# Altium PCB MasterBoard.PcbDoc (part 4 of 4)
Units mil, origin at the board's own origin, x right, y up, seen from the top; angles counter-clockwise.
Board outline 11195 x 7075 mil, 2 copper layers (Top Layer, Bottom Layer); 563 components, 331 nets, 1395 pads, 369 vias.
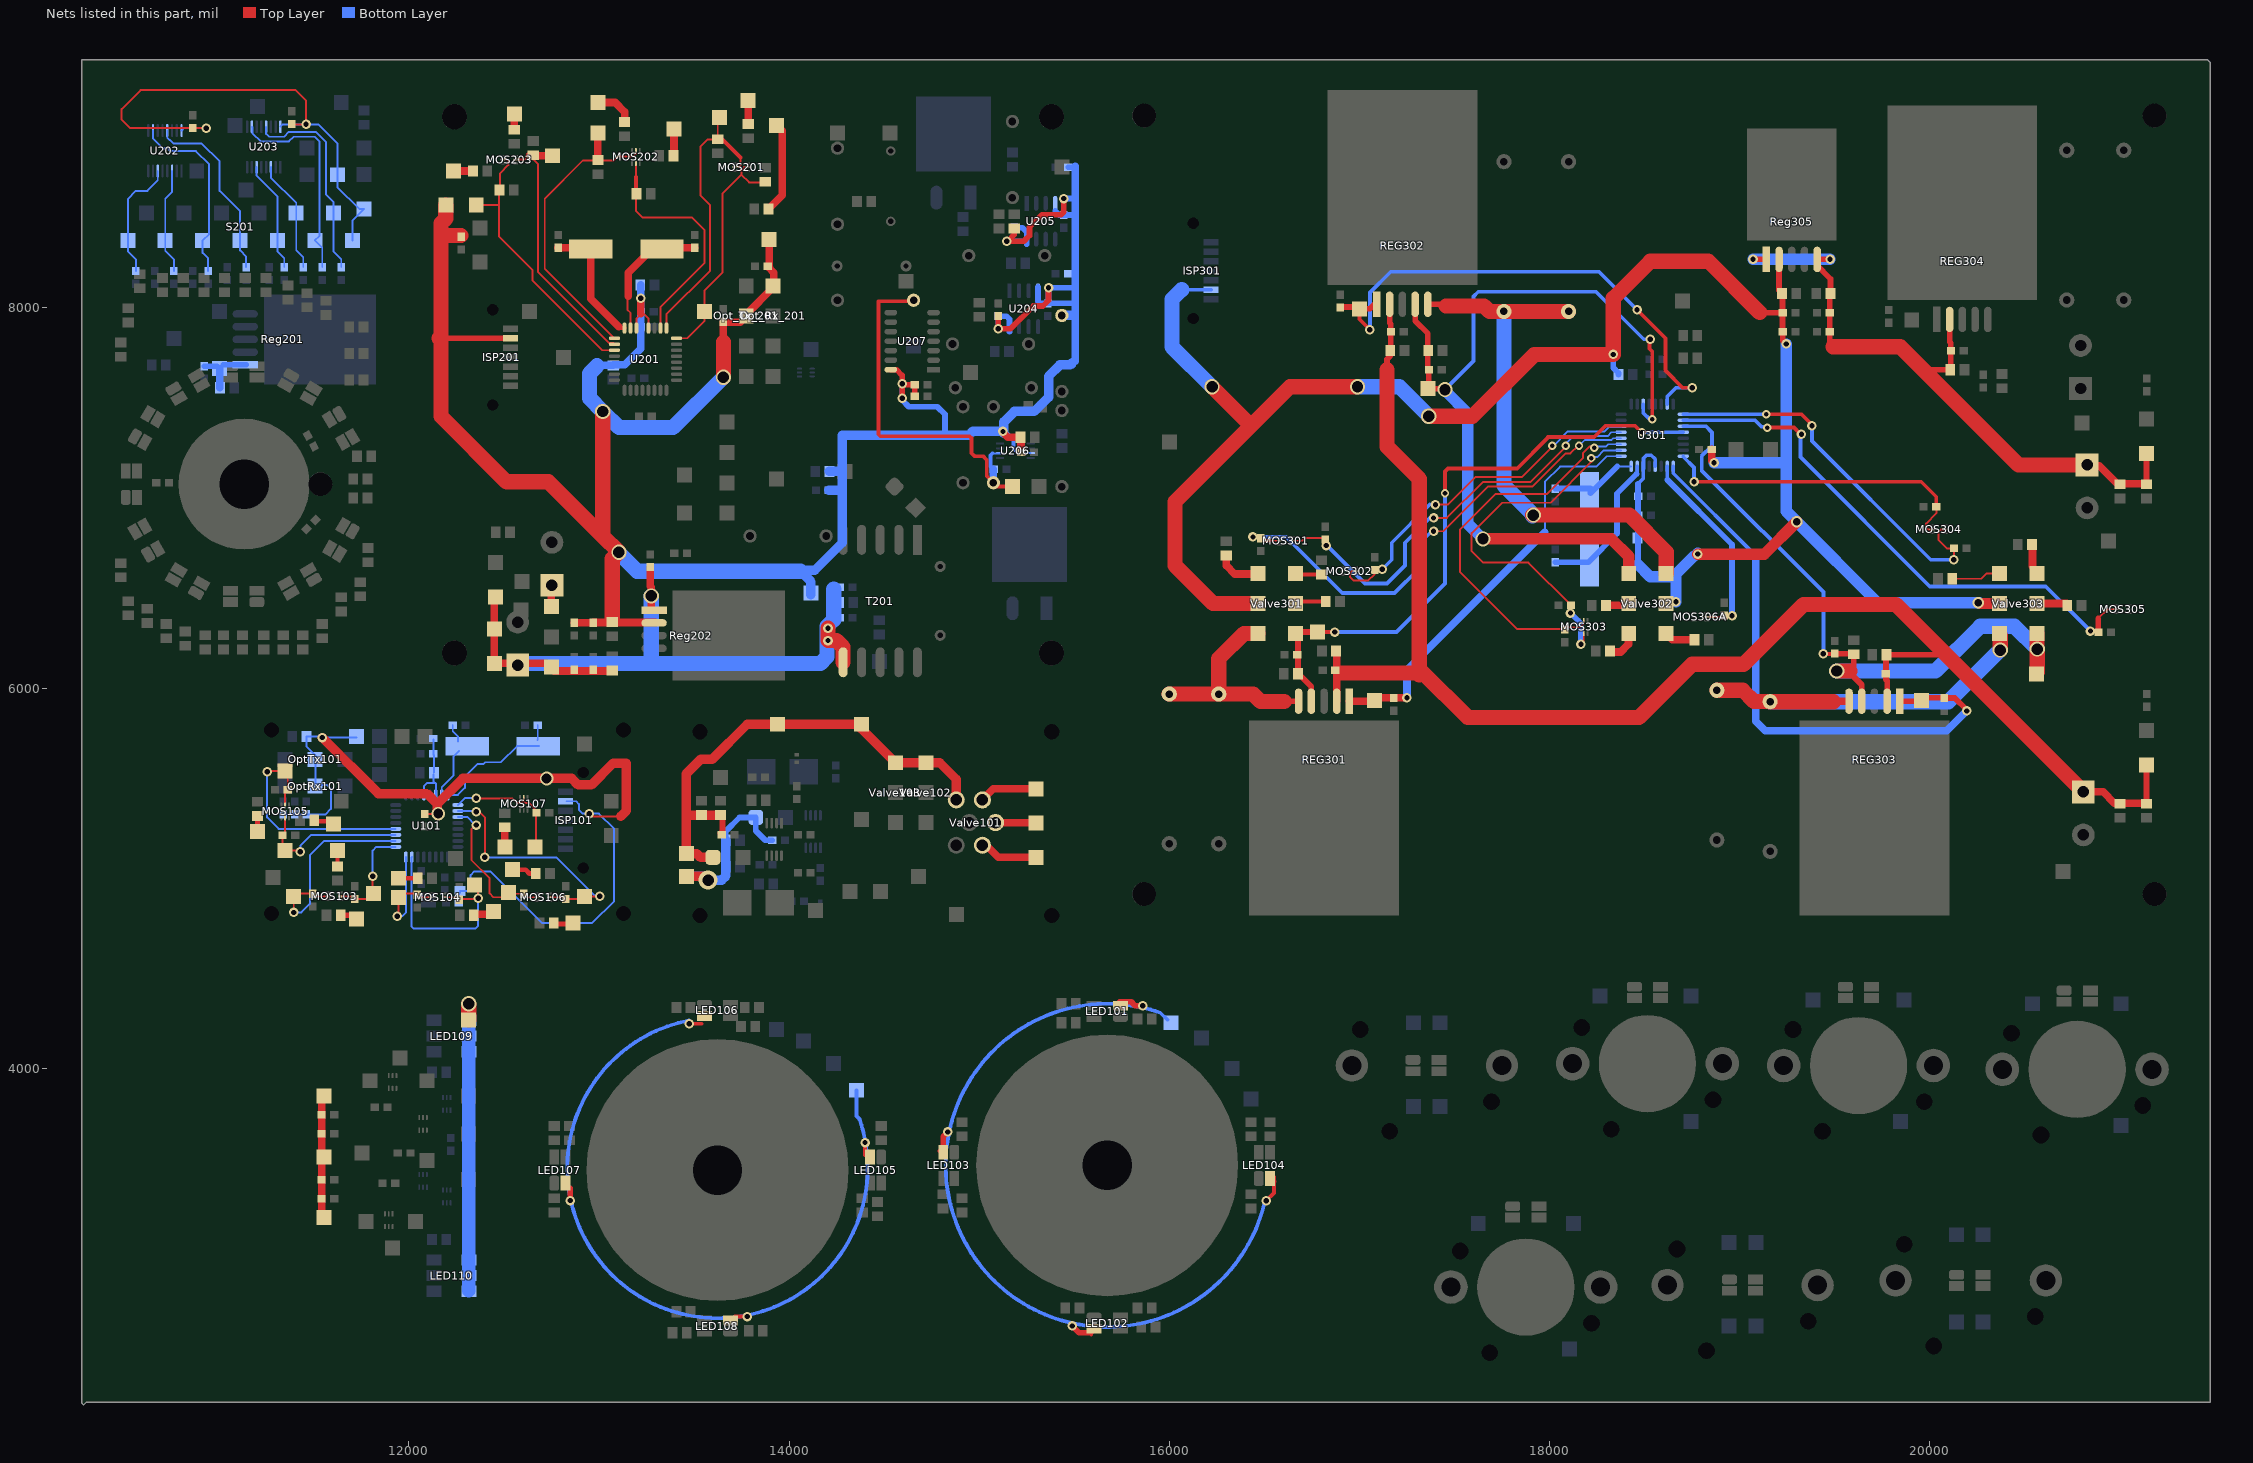
[diagram p4: the nets of this part, all layers, seen from the top]

## Via types
v1: diameter 50, hole 28, Top Layer to Bottom Layer, 263 vias
v2: diameter 80, hole 60, Top Layer to Bottom Layer, 55 vias
v3: diameter 44, hole 24, Top Layer to Bottom Layer, 25 vias
v4: diameter 72, hole 52, Top Layer to Bottom Layer, 11 vias
v5: diameter 145, hole 125, Top Layer to Bottom Layer, 8 vias
v6: diameter 60, hole 40, Top Layer to Bottom Layer, 2 vias
v7: diameter 80, hole 40, Top Layer to Bottom Layer, 2 vias
v8: diameter 100, hole 60, Top Layer to Bottom Layer, 1 vias
v9: diameter 100, hole 80, Top Layer to Bottom Layer, 1 vias
v10: diameter 50, hole 28, Top Layer to Bottom Layer, tented top, 1 vias

## Nets (pads, with @x,y where several pads share a name; then routed paths per layer and width w, separated by ;. In a path a pad name is that pad's centre, name@x,y a point inside that pad or via, vN(x,y) a via of type N, cw(c..) or ccw(c..) an arc to the next point about the centre after c; other vN are vias at no path point) (continued)
SW_205: R205.1 S201.3 U202.3 | length 560.4
  Bottom Layer w10: U202.3@10755,8720 10755,8610 10719.17,8574.17 S201.3@10719.17,8354.33 10719.17,8300.83 10765,8255 R205.1@10765,8193.46
SW_206: R201.1 S201.1 U202.6 | length 644.7
  Bottom Layer w10: R201.1@10565,8193.46 10565,8255 10522.32,8297.68 S201.1@10522.32,8354.33 10522.32,8572.32 10565,8615 10625,8615 10680,8670 U202.6@10680,8720
SW_207: R209.1 S201.6 U202.10 | length 988
  Bottom Layer w10: U202.10@10655,8932.6 10655,8890 10711.34,8833.66 10719.67,8842 10728.48,8842 10746.35,8824.13 10880.82,8824.13 10950,8754.95 10950,8388.31 S201.6@10916.02,8354.33 10916.02,8288.98 10945,8260 R209.1@10945,8193.46
SW_208: R204.2 S201.8 U202.13 | length 978.9
  Bottom Layer w10: U202.13@10730,8932.6 10730,8895 10743,8882 10745.05,8882 10762.92,8864.13 10910.87,8864.13 11005,8770 11005,8615 11112.87,8507.13 S201.8@11112.87,8354.33 11112.87,8302.13 11145,8270 R204.2@11145,8213.46
SW_209: R210.2 S201.11 U203.3 | length 597
  Bottom Layer w10: U203.3@11275,8740 11275,8685 11408.15,8551.85 S201.11@11408.15,8500 11408.15,8301.85 11445,8265 R210.2@11445,8213.46
SW_210: R208.2 S201.10 U203.6 | length 586.6
  Bottom Layer w10: U203.6@11200,8740 11200,8695 11309.72,8585.28 S201.10@11309.72,8354.33 11309.72,8295.28 11345,8260 R208.2@11345,8213.46
SW_211: R244.2 S201.12 U203.10 | length 1113.9
  Bottom Layer w10: U203.10@11175,8952.6 11178.76,8948.84 11178.76,8916.58 11220.34,8875 11370,8875 11395,8900 11505,8900 11530,8875 11530,8377.76 S201.12@11506.57,8354.33 11545,8315.91 R244.2@11545,8213.46
SW_212: R245.1 S201.13 U203.13 | length 1081.6
  Bottom Layer w10: U203.13@11250,8952.6 11250,8915 11265,8900 11345,8900 11370,8925 11510,8925 11565,8870 11565,8595 11605,8555 S201.13@11605,8500 11605,8295 11645,8255 R245.1@11645,8213.46
VALVE+301: C303.2 C304.2 REG301.4 TP301.1 U301.28 Valve301.2 | length 3236.9
  Top Layer w20: TP301.1@16785,6295 v1(16870,6295) ; v3(17450,7025) 17450,7140 17465,7155 17830,7155 17990,7315 ; 17990,7320 18235,7320 18295,7380 18450,7380 v3(18485,7345)
  Top Layer w30: C304.2@16677.4,6075 16677.4,6277.6 16665,6290 16670,6295 TP301.1@16780,6295 TP301.1@16785,6295 ; C304.2@16685,6070 16746.93,6008.07 REG301.4@16746.93,5931.06
  Bottom Layer w20: v1@16860,6295 v1(16870,6295) 17195,6295 17450,6550 v3@17450,7020 ; v3@18485.75,7345.75 U301.28@18703.39,7345.75
VALVE+302: C307.2 C308.2 REG302.4 TP303.1 U301.19 Valve302.2 | length 4428.9
  Top Layer w20: v1@18525,7835 18525,7785 18540,7770 v3(18540,7415)
  Top Layer w30: REG302.4@17293.07,8018.94 17293.07,7931.93 17360,7865 17360,7775 17360,7685 17365,7680 17365,7675 17365,7575 v2@17440,7575
  Top Layer w60: v2@17645,6785 v2(17650,6785) 18325,6785 18416.57,6693.43 Valve302.2@18416.57,6602.48
  Bottom Layer w20: v2@17455,7575 17600,7720 17600,8060 17625,8085 18245,8085 18495,7835 v1(18530,7835) ; U301.19@18492.76,7493.39 18492.76,7447.24 18525,7415 v3@18535,7415
  Bottom Layer w60: v2@17450,7565 17570,7445 17570,6865 v2(17650,6785)
  other v2: 17450,7570
VALVE+303: C311.2 C312.2 REG303.4 TP305.1 U301.27 Valve303.2 | length 3507.1
  Top Layer w20: v1(19440,6180) C311.2@19495,6180
  Top Layer w30: C311.2@19500,6180 19600,6180 C312.2@19600,6177.6 19600,6060 19641.93,6018.07 REG303.4@19641.93,5931.06
  Top Layer w80: v2@19515,6090 19580,6090 ; v2@20563.43,6206.57 Valve303.2@20563.43,6287.52 ; TP305.1@20565,6085 v2(20565,6205)
  Bottom Layer w20: U301.27@18703.39,7377.24 18822.76,7377.24 18855,7345 18855,7275 18800,7220 18800,7145 19440,6505 v1(19440,6180)
  Bottom Layer w80: v2(19510,6090) 20030,6090 20265,6325 20445,6325 v2(20565,6205)
VALVE-301: R301.1 R303.1 REG301.5 Valve301.1 | length 1142.5
  Top Layer w30: 16605,5931.06 REG301.5@16680,5931.06
  Top Layer w80: R303.1@16000,5968.7 R301.1@16260,5968.7 16441.3,5968.7 16480,5930 16605,5930 ; R301.1@16260,5970 16260,6155 16392.52,6287.52 Valve301.1@16466.57,6287.52
VALVE-302: R308.1 R309.1 REG302.5 Valve302.1 | length 2764.5
  Top Layer w30: REG302.5@17360,8018.94 17441.06,8018.94
  Top Layer w80: 17455,8010 17655,8010 17683.7,7981.3 R308.1@17760,7981.3 ; R308.1@17773.7,7981.3 R309.1@18100,7981.3 ; v2@17910,6910 v2(17915,6910) 18420,6910 18613.43,6716.57 Valve302.1@18613.43,6602.48
  Bottom Layer w80: R308.1@17760,7981.3 17760,7065 v2(17915,6910) v2@17910,6905
VALVE-303: R314.2 R315.2 REG303.5 Valve303.1 | length 2116.5
  Top Layer w40: 19498.94,5931.06 REG303.5@19575,5931.06
  Top Layer w80: R315.2@18880,5988.7 19016.3,5988.7 19075,5930 19160,5930 R314.2@19165,5930 ; R314.2@19160,5928.7 19493.7,5928.7 ; v2(20370,6200) Valve303.1@20370,6275
  Bottom Layer w80: R314.2@19160,5928.7 20098.7,5928.7 v2(20370,6200)
VALVE_B_101: I125.1 R106.1 | length 90
  Top Layer w20: R106.1@11625,5055 R106.1@11625,5062.4 I125.1@11625,5145
VALVE_B_101B: I107.1 Valve101.1 | length 306.7
  Top Layer w40: Valve101.1@15017.24,5412.13 15075.12,5470 I107.1@15300,5470
VALVE_B_102: I126.1 R116.1 | length 82.6
  Top Layer w25: R116.1@11515,5300 I126.1@11597.6,5300
VALVE_B_103: I128.1 R123.1 | length 100
  Top Layer w40: I128.1@12505,5165 R123.1@12505,5265
VALVE_B_201: I226.1 R247.1 | length 482.5
  Top Layer w10: I226.1@13935,8960 I226.1@13965,8930
  Top Layer w40: R247.1@13892.4,8520 13965,8592.6 I226.1@13965,8930
VALVE_B_202: I230.1 R254.1 | length 62.6
  Top Layer w40: R254.1@12555,8937.4 I230.1@12555,9000
VALVE_B_301: R317.1 Valve301.6 | length 137.6
  Top Layer w20: Valve301.6@16662.4,6597.6 16663.43,6597.6 R317.1@16800,6597.6
VALVE_B_302: R323.1 Valve302.6 | length 166.6
  Top Layer w40: R323.1@18320,6190 18375,6190 18415,6230 Valve302.6@18415,6285
VALVE_B_303: R329.1 Valve303.6 | length 162.2
  Top Layer w10: Valve303.6@20540,6640 20563.43,6616.57 Valve303.6@20563.43,6602.48
  Top Layer w40: Valve303.6@20540,6640 R329.1@20540,6755
VALVE_B_PWM_101: MOS103.2 R113.2 TP106.1 U101.26 | length 1093.1
  Top Layer w10: v1(11395,4820) TP106.1@11395,4905 ; TP106.1@11420,4920 11495,4920 11500,4920 11515,4905 MOS103.2@11575,4905
  Bottom Layer w10: v1@11390,4820 v1(11395,4820) 11435,4820 11480,4865 11480,5120 11556.26,5196.26 U101.26@11931.61,5196.26
VALVE_B_PWM_102: MOS105.2 R120.2 TP109.1 U101.28 | length 1205.4
  Top Layer w10: v1@11255,5565 TP109.1@11350,5565 ; MOS105.2@11350,5385 11350,5460 R120.2@11355,5465 ; R120.2@11363.46,5465 TP109.1@11363.46,5551.54
  Bottom Layer w10: v1(11255,5560) 11255,5320 11315.75,5259.25 U101.28@11931.61,5259.25
VALVE_B_PWM_103: MOS107.2 R126.2 TP113.1 U101.9 | length 666.8
  Top Layer w10: v1(12355,5420) 12545,5420 12568.78,5396.22 12593.28,5396.22 12605,5407.94 ; MOS107.2@12605,5425 12605,5407.94 ; TP113.1@12670,5170 R126.2@12670,5345 ; R126.2@12671.54,5345 12671.54,5358.46 12633.78,5396.22 12613.79,5396.22 12605,5405.01 ; 12605,5405.01 12605,5407.94 ; 12605,5405.01 12605,5407.94
  Bottom Layer w10: U101.9@12258.39,5385.24 12295,5421.85 v1@12348.15,5421.85
VALVE_B_PWM_201: MOS202.2 R251.2 U201.2 | length 1268.8
  Top Layer w10: R251.2@13195,8600 13195,8510 13230,8475 13490,8475 13555,8410 13555,8235 13323.74,8003.74 U201.2@13323.74,7893.39 ; 13195,8685 MOS202.2@13195,8760
  Top Layer w20: R251.2@13195,8600 13195,8685 13195,8690
VALVE_B_PWM_202: MOS203.2 R257.2 TP214.1 U201.11 | length 1463.2
  Top Layer w10: TP214.1@12355,8540 12475,8540 ; R257.2@12475,8640 12475,8540 ; R257.2@12480,8630 12480,8640 12480,8707.94 12523.78,8751.72 12523.78,8771.22 12515,8780 MOS203.2@12495,8780 ; U201.11@13081.61,7777.24 13017.76,7777.24 12650,8145 12650,8200 12475,8375 12475,8540
VALVE_B_PWM_301: MOS301.5 R320.2 U301.13 | length 2245.7
  Top Layer w10: MOS301.5@16646.93,6775 16700,6775 16715,6790 R320.2@16815,6790 ; v1(17390,6895) 17460,6895 17650,7085 17900,7085 v3@18090,7275
  Bottom Layer w10: v3@18085,7280 18085,7285 18125,7325 18305,7325 18325.75,7345.75 U301.13@18376.61,7345.75
  Bottom Layer w20: 16815,6780 16815,6765 16827.5,6752.5 17030,6550 17145,6550 17240,6645 17240,6765 17370,6895 v1(17390,6895)
  other v1: 16825,6750
  other v3: 18085,7275
VALVE_B_PWM_302: MOS303.2 R326.2 U301.11 | length 2065.5
  Top Layer w10: R326.2@18075,6320 18080,6320 18162.06,6320 18180,6337.94 MOS303.2@18180,6355 ; R326.2@18080,6310 17830,6310 17530,6610 17530,6835 17715,7020 17985,7020 18175,7210 18175,7235 18210,7270 v3@18235,7270
  Bottom Layer w10: v3@18245,7270 18295,7270 18307.76,7282.76 U301.11@18376.61,7282.76
  other v3: 18235,7265
VALVE_B_PWM_303: MOS304.5 R332.2 U301.32 | length 1688.2
  Top Layer w10: MOS304.5@20013.07,6835 19990,6835 19980,6845 19980,6865 20035,6920 R332.2@20035,6955 ; R332.2@20030,6955 R332.2@20031.73,6953.27
  Top Layer w20: v1(18760,7085) 19955,7085 20033.46,7006.54 R332.2@20033.46,6955
  Bottom Layer w20: U301.32@18703.39,7219.76 18703.39,7216.61 18760,7160 v1(18760,7085)
VALVE_G_101: I136.1 R105.1 | length 90
  Top Layer w25: I136.1@11945,5000 R105.1@12035,5000
VALVE_G_101B: I119.1 Valve101.3 | length 211
  Top Layer w40: Valve101.3@15086.14,5292.83 I119.1@15297.17,5292.83
VALVE_G_102: I137.1 R115.1 | length 80
  Top Layer w25: I137.1@11205,5250 R115.1@11205,5327.6 R115.1@11205,5330
VALVE_G_103: I127.1 R122.1 | length 92.6
  Top Layer w25: R122.1@12755,4760 12762.4,4760 I127.1@12847.6,4760
VALVE_G_201: I224.1 R246.1 | length 112.6
  Top Layer w40: R246.1@13785,8967.4 I224.1@13785,9080
VALVE_G_202: I229.1 R253.1 | length 135
  Top Layer w40: R253.1@13395,8805 I229.1@13395,8940
VALVE_G_301: R316.1 Valve301.5 | length 241.2
  Top Layer w40: R316.1@16300,6697.6 16300,6645 16345,6600 16466.57,6600 Valve301.5@16470,6600
VALVE_G_302: R322.1 Valve302.5 | length 165
  Top Layer w40: Valve302.5@18613.43,6287.52 18645.94,6255 R322.1@18762.6,6255 R322.1@18765,6255
VALVE_G_303: R328.1 Valve303.5 | length 258
  Top Layer w10: R328.1@20120,6575 20270,6575 20297.48,6602.48 Valve303.5@20366.57,6602.48
VALVE_G_PWM_101: MOS104.5 R112.2 TP105.1 U101.24 | length 621.2
  Top Layer w10: TP105.1@11935,4920 11945,4920 12030,4920 12040.77,4909.23 12050,4900 MOS104.5@12118.07,4900 ; v1@11945,4815 TP105.1@11945,4900
  Bottom Layer w10: v1(11940,4800) 11965,4800 11984.76,4819.76 U101.24@11984.76,5111.61
VALVE_G_PWM_102: MOS105.5 R119.2 TP108.1 U101.27 | length 817.2
  Top Layer w10: TP108.1@11336.54,5133.46 11336.54,5145 R119.2@11336.54,5225 ; R119.2@11345,5230 11350,5235 MOS105.5@11350,5318.07 ; TP108.1@11350,5145 v1@11425,5145
  Bottom Layer w10: v1@11430,5135 v1(11430,5140) 11430,5170 11487.76,5227.76 U101.27@11931.61,5227.76
VALVE_G_PWM_103: MOS106.5 R125.2 TP112.1 U101.10 | length 1324.7
  Top Layer w10: v1(12355,5350) 12370,5350 12400,5320 v1(12400,5110) v1@12400,5100 ; MOS106.5@12741.93,4900 R125.2@12815,4900 ; R125.2@12825,4891.54 TP112.1@12923.46,4891.54 ; TP112.1@12925,4905 v1(13005,4905) v1@13015,4905
  Bottom Layer w10: U101.10@12258.39,5353.74 v1@12351.26,5353.74 ; v1@12400,5115 v1(12400,5110) 12775,5110 12975,4910 v1@13005,4910
VALVE_G_PWM_201: MOS201.2 R249.2 TP209.1 U201.1 | length 1520.5
  Top Layer w10: U201.1@13355.24,7893.39 13355.24,7965.24 13585,8195 13585,8540 13535,8590 13535,8850 13570,8885 R249.2@13625,8885 ; TP209.1@13625,8995 R249.2@13625,8887.4 R249.2@13625,8885 ; R249.2@13650,8885 R249.2@13625,8885 ; MOS201.2@13715,8740 13734.99,8740 13745,8750.01 13745,8790
  Top Layer w20: R249.2@13650,8885 13745,8790
VALVE_G_PWM_202: MOS203.5 R258.2 TP215.1 U201.10 | length 1386.3
  Top Layer w10: MOS203.5@12561.93,8780 12610,8780 R258.2@12630,8800 ; R258.2@12635,8800 12680,8755 12680,8187.03 13051.64,7815.39 13074.96,7815.39 U201.10@13081.61,7808.74
  Top Layer w40: R258.2@12635,8800 TP215.1@12755,8800
VALVE_G_PWM_301: MOS301.2 R319.2 U301.12 | length 2568.4
  Top Layer w10: 16525,6775 MOS301.2@16580,6775 ; v1(17390,6825) 17440,6825 17675,7060 17910,7060 18085,7235 18110,7235 v3@18150,7275
  Top Layer w20: R319.2@16480,6795 16483.27,6791.73 16500,6775 16525,6775
  Bottom Layer w10: v3@18150,7280 18160,7280 18185,7305 18325,7305 18334.25,7314.25 U301.12@18376.61,7314.25
  Bottom Layer w20: v1(16440,6795) 16615,6795 16910,6500 17185,6500 17310,6625 17310,6755 v1@17380,6825
  other v3: 18155,7275
VALVE_G_PWM_302: MOS306A.5 R325.2 U301.2 | length 1028.1
  Top Layer w10: MOS306A.5@18826.93,6375 18920,6375 18923.27,6378.27 R325.2@18925,6380
  Bottom Layer w20: 18618.74,7096.26 U301.2@18618.74,7166.61
  Bottom Layer w30: 18618.74,7096.26 18960,6755 v1(18960,6380)
VALVE_G_PWM_303: MOS304.2 R331.2 U301.25 | length 2019.4
  Top Layer w10: MOS304.2@20080,6835 20060,6835 20045,6820 20045,6780 20090,6735 R331.2@20125,6735 ; v1@20126.54,6678.46 R331.2@20126.54,6735
  Top Layer w20: v3(19140,7440) 19325,7440 v1@19380,7385
  Bottom Layer w20: U301.25@18703.39,7440.24 v3@19139.76,7440.24 ; v1(19380,7380) 19380,7300 20005,6675 v1(20125,6675)
VALVE_R_101: I134.1 R107.1 | length 95
  Top Layer w40: R107.1@12345,4810 I134.1@12440,4810
VALVE_R_101B: I108.1 Valve101.5 | length 309.1
  Top Layer w10: Valve101.5@15017.24,5173.54 Valve101.5@15036.46,5173.54
  Top Layer w40: Valve101.5@15036.46,5173.54 15100,5110 I108.1@15300,5110
VALVE_R_102: I135.1 R118.1 | length 72.6
  Top Layer w30: R118.1@11642.4,4805 I135.1@11715,4805
VALVE_R_103: I102.1 R124.1 | length 133.3
  Top Layer w25: I102.1@12545,5045 12615,5045 12635,5025 R124.1@12667.6,5025 R124.1@12670,5025
VALVE_R_201: I231.1 R248.1 | length 210.7
  Top Layer w40: I231.1@12995,9080 13085,9080 13135,9030 R248.1@13135,8980
VALVE_R_202: I227.1 R255.1 | length 100
  Top Layer w40: I227.1@12235,8720 R255.1@12335,8720
VALVE_R_301: R318.1 Valve301.4 | length 152.6
  Top Layer w20: Valve301.4@16670,6455 R318.1@16822.6,6455
VALVE_R_302: R324.1 Valve302.4 | length 107.6
  Top Layer w40: R324.1@18297.4,6435 Valve302.4@18405,6435
VALVE_R_303: R330.1 Valve303.4 | length 156.6
  Top Layer w40: Valve303.4@20563.43,6445 R330.1@20720,6445
VALVE_R_PWM_101: MOS104.2 R114.2 TP107.1 U101.23 | length 1146.7
  Top Layer w10: MOS104.2@12185,4900 12260,4900 12269.23,4890.77 12270,4890 12365,4890 v1@12375,4890 ; v1@12365,4900 12365,4965 TP107.1@12365,4980
  Bottom Layer w10: U101.23@12016.26,5111.61 12014.88,5110.24 12014.88,4745.12 12025,4735 12350,4735 12365,4750 v1(12365,4895)
VALVE_R_PWM_102: MOS103.5 R121.2 TP110.1 U101.25 | length 521.4
  Top Layer w10: MOS103.5@11641.93,4905 R121.2@11705,4905 ; R121.2@11715,4891.54 11796.54,4891.54 TP110.1@11805,4900 ; TP110.1@11810,4920 v1@11810,5005
  Bottom Layer w10: v1@11810,4995 v1(11810,5010) 11810,5145 11829.76,5164.76 U101.25@11931.61,5164.76
VALVE_R_PWM_103: MOS106.2 R127.2 TP114.1 U101.11 | length 757.6
  Top Layer w10: v1@12345,5275 12330,5260 12330,5095 12425,5000 12425,4920 12445,4900 TP114.1@12495,4900 ; TP114.1@12506.54,4918.46 12525,4918.46 R127.2@12605,4918.46 ; R127.2@12610,4915 12625,4900 MOS106.2@12675,4900
  Bottom Layer w10: U101.11@12258.39,5322.24 12307.76,5322.24 v1@12350,5280
  other v1: 12355,5280
VALVE_R_PWM_201: MOS201.5 R250.2 TP210.1 U201.32 | length 1240.3
  Top Layer w10: U201.32@13408.39,7840.24 13465.24,7840.24 13555,7930 TP210.1@13555,7980 13555,8090 13650,8185 13650,8600 13750,8700 ; MOS201.5@13781.93,8740 13763.28,8740 13750,8726.72 13750,8700 ; R250.2@13875,8660 13790,8660 13750,8700
VALVE_R_PWM_202: MOS202.5 R256.2 TP213.1 U201.9 | length 1626
  Top Layer w10: U201.9@13081.61,7840.24 12715,8206.85 12715,8575 12915,8775 12995,8775 13080,8775 13100,8795 13180.13,8795 13195,8809.87 MOS202.5@13195,8820 ; MOS202.5@13195,8825 MOS202.5@13195,8820 ; MOS202.5@13195,8826.93 MOS202.5@13195,8820
  Top Layer w40: R256.2@12995,8780 TP213.1@12995,8920
VALVE_R_PWM_301: MOS302.2 R321.2 U301.14 | length 1831.5
  Top Layer w10: MOS302.2@16980,6615 16960,6615 16950,6605 16950,6585 16970,6565 17045,6565 17080,6600 R321.2@17080,6620 ; v1(17400,6965) 17465,6965 17610,7110 17855,7110 18022.5,7277.5 v3@18022.5,7282.5
  Bottom Layer w10: v3@18015.62,7270.62 18095,7350 18290,7350 18320,7380
  Bottom Layer w20: v1(17120,6625) 17170,6675 17170,6765 17370,6965 ; 18322.24,7377.24 U301.14@18376.61,7377.24
  other v3: 18015,7275
VALVE_R_PWM_302: MOS303.5 R327.2 U301.10 | length 1960.5
  Top Layer w10: R327.2@18110,6430 R327.2@18110,6435 ; R327.2@18113.46,6435 17888.46,6660 17650,6660 17590,6720 17590,6815 17750,6975 18005,6975 18220,7190 v3(18220,7210) ; v1(18165,6230) 18180,6245 MOS303.5@18180,6288.07
  Bottom Layer w10: v3@18225,7215 18250,7215 18285,7250 18375.35,7250 U301.10@18376.61,7251.26
  Bottom Layer w30: v1(18110,6395) 18165,6340 v1@18165,6235
VALVE_R_PWM_303: MOS305.2 R333.2 U301.26 | length 2854.2
  Top Layer w10: 20886.54,6366.54 20935,6415 MOS305.2@20980,6415
  Top Layer w20: v3(19145,7370) 19285,7370 v1@19320,7335
  Top Layer w30: R333.2@20886.54,6295 20886.54,6366.54
  Bottom Layer w20: U301.26@18703.39,7408.74 19081.26,7408.74 19115,7375 v3@19145,7375 ; v1@19320,7335 19320,7215 20000,6535 20610,6535 v1(20845,6300)
  other v1: 19325,7335
VALVEEN301: R302.2 REG301.1 TP302.1 U301.9 | length 2200.8
  Top Layer w40: REG301.1@16947.72,5931.06 17080,5931.06 TP302.1@17081.06,5931.06 ; TP302.1@17080,5935 17095,5950 R302.2@17180,5950 ; R302.2@17180,5948.46 v1@17248.46,5948.46
  Bottom Layer w10: 17975,6820 17975,7085 18055,7165 18245,7165 18299.76,7219.76 U301.9@18376.61,7219.76
  Bottom Layer w40: v1(17250,5950) 17250,6095 17975,6820
VALVEEN302: R310.2 REG302.1 TP304.1 U301.23 | length 2805.6
  Top Layer w20: TP304.1@17000,7990 17000,7940 v1(17055,7885) ; v1@18465,7985 18610,7840 18610,7670 18700,7580 v1(18750,7580)
  Top Layer w30: R310.2@16900,8005 16975,8005 16985,7995 TP304.1@17000,7995 17055,7995 17078.94,8018.94 REG302.1@17092.28,8018.94
  Bottom Layer w20: v1(17055,7885) 17055,8080 17165,8190 18260,8190 v1(18460,7990) ; U301.23@18618.74,7493.39 18618.74,7533.74 18665,7580 v1(18750,7580)
VALVEEN303: R312.2 REG303.1 TP306.1 U301.1 | length 3082.3
  Top Layer w30: REG303.1@19842.72,5931.06 19955,5931.06 19956.06,5931.06 19957.5,5932.5 19975,5950 R312.2@20075,5950 ; R312.2@20075,5948.46 20131.54,5948.46 v1@20195,5885
  Bottom Layer w20: U301.1@18650.24,7166.61 18650.24,7129.76 19085,6695
  Bottom Layer w40: 19085,6695 19085,5825 19135,5775 20090,5775 v1(20195,5880)
VBATT201: Batt201.1 C219.1 C221.1 C222.1 C223.2 C224.2 C225.2 I223.1 I232.1 R263.1 Reg202.1 S202.1 T201.6 TP221.1 | length 3814
  Top Layer w40: TP221.1@12450,6320 TP221.1@12450,6310 ; S202.1@12450,6475 TP221.1@12450,6310 ; C225.2@13075,6090 13070,6090 12970,6090 12870,6090 12765,6090 12747.5,6107.5 12725,6130 12590,6130 I223.1@12450,6130 TP221.1@12450,6310 ; R263.1@13270,6632.6 13270,6535 13275,6530 v2(13275,6485) Reg202.1@13275,6415
  Top Layer w80: v1(14205,6315) v1(14205,6250) 14250,6250 14284.45,6215.55 T201.6@14284.45,6135.91
  Bottom Layer w40: 13250,6130 13275,6155
  Bottom Layer w80: Batt201.1@12590,6130 13250,6130 14165,6130 14200,6165 14200,6250 14200,6315 14200,6325 14235,6360 14235,6370 14235,6450 14235,6520 ; 13275,6155 v2(13275,6485)
VBATT201A: C239.1 C244.1 I211.1 Reg201.1 | length 314.8
  Bottom Layer w10: I211.1@11005,7680 I211.1@11025,7700
  Bottom Layer w30: C239.1@10925,7693.46 I211.1@10991.54,7693.46 ; I211.1@11025,7700 Reg201.1@11145,7700
  Bottom Layer w40: C244.1@11005,7580 I211.1@11005,7680
VBATT_INPUT201: BT201.1 I233.1 | length 115
  Top Layer w40: I233.1@12750,6430 BT201.1@12750,6545
VCC101: C102.2 C104.2 C105.2 C106.2 C109.2 C126.2 C127.2 C128.2 I133.1 ISP101.2 L101.2 OptRx101.2 OptTx101.2 R128.2 U101.4 U101.6 | length 5747.9
  Top Layer w10: R128.2@12085,5338.46 v4@12148.46,5338.46 ; v1@12940,5340 v1(12950,5340) 12960,5340 12960,5335 12970,5325 13115,5325
  Top Layer w50: v1(11545,5740) 11840,5445 12095,5445 12150,5390 ; v4@12150,5340 12150,5390 ; 13115,5325 13145,5355 13145,5605 13075,5605 12961,5491 12891.08,5491 12857.08,5525 v4(12725,5525) 12285,5525 12150,5390
  Bottom Layer w10: C127.2@11340,5336.54 11398.46,5336.54 11400,5335 11560,5335 11590,5365 11590,5470 11570,5490 OptRx101.2@11515,5490 ; OptRx101.2@11515,5495 11510,5500 11510,5645 11462.4,5692.6 C126.2@11462.4,5745 v1@11540,5745 ; v1(11545,5740) I133.1@11725,5740 ; U101.4@12079.25,5438.39 12079.25,5484.25 12095,5500 12140,5500 ; C104.2@12130,5545 12130,5510 12140,5500 ; C105.2@12130,5730 12130,5650 12132.4,5647.6 C104.2@12132.4,5555 ; v4@12150,5345 12142.24,5352.76 U101.6@12142.24,5438.39 12142.24,5497.76 12140,5500 ; C128.2@12263.46,4870 12263.46,4918.46 L101.2@12270,4925 ; L101.2@12270,4932.6 12307.6,4932.6 12325,4950 12325,5016.57 12345,5036.57 12428.43,5036.57 12700,4765 12965,4765 13080,4880 13080,5260 13000,5340 v1(12950,5340) 12915,5340 12895,5360 12895,5390 12880,5405 ISP101.2@12830,5405
  other v4: 12155,5340
VCC101A: I144.1 LED109.1 LED110.1 | length 1590
  Top Layer w80: I144.1@12315,4255 v2@12315,4335
  Bottom Layer w70: LED110.1@12315,2830 12315,2910 12315,2992.68 12315,4087.32 12315,4170 12315,4252.68 v2(12315,4340)
VCC101B: C112.2 C113.2 D101.1 I121.1 I150.1 R129.2 TP118.1 Valve101.2 Valve102.3 Valve103.3 | length 2599.7
  Top Layer w10: I121.1@14380,5787.48 I121.1@14380,5810
  Top Layer w30: R129.2@13640,5236.54 13650,5246.54 C112.2@13650,5322.6
  Top Layer w50: 13467.4,5332.6 C113.2@13540,5332.6 C112.2@13640,5332.6 ; D101.1@13600,5110 13535,5110 13515,5130 TP118.1@13460,5130 13460,5550 13535,5625 13595,5625 13780,5810 I121.1@14380,5810 ; I121.1@14380,5787.48 Valve103.3@14560,5607.48 Valve102.3@14720,5607.48 14792.52,5607.48 14879.45,5520.55 Valve101.2@14879.45,5412.13
VCC102A: C122.2 C123.2 C124.2 C125.2 I109.1 I139.1 I145.1 | length 636.9
  Top Layer w40: I109.1@11541.54,3211.54 11541.54,3215 C124.2@11541.54,3315 C122.2@11541.54,3415 11541.54,3535 C123.2@11541.54,3655 C125.2@11541.54,3755 I139.1@11541.54,3848.46
VCC102B: C116.2 C117.2 D102.1 I123.1 R130.2 TP116.1 | length 943.2
  Top Layer w50: I123.1@13460,5010 13555,5010 v8(13575,4990)
  Bottom Layer w30: C117.2@13667.6,5200 13667.6,5247.6 13740,5320 D102.1@13825,5320 13825,5250 13875,5200 R130.2@13911.54,5200
  Bottom Layer w50: TP116.1@13460,5010 13550,5010 v8@13570,4990 ; v8(13575,4990) 13645,4990 13667.6,5012.6 C116.2@13667.6,5060 C117.2@13667.6,5200
VCC102L: I111.1 LED101.2 LED102.2 LED103.2 LED104.2 | length 4713.4
  Top Layer w20: LED103.2@14790,3565 LED103.2@14797.18,3572.18 ; LED102.2@15582.15,2607.85 15590,2600 ; v1(16509.53,3304.53) 16550,3345 LED104.2@16550,3430 ; LED104.2@16550.31,3400.32 LED104.2@16555,3405
  Top Layer w30: LED103.2@14810.47,3558.9 14810.47,3640.47 v1@14835,3665 ; v1@15490,2645 15525,2610 15584.29,2610 LED102.2@15604.76,2630.47 ; LED101.2@15740,4350 15742.56,4350 15800,4350 15820.47,4329.53 v1(15860.47,4329.53)
  Bottom Layer w20: I111.1@15990,4255.5 15952.55,4292.95 ccw(c15673.66,3490) 15873.93,4316.07 ccw(c15673.66,3490) v1@16504.19,3309.09
  other v1: 15489.53,2645.47 14835.47,3665.47
VCC102R: I113.1 LED105.2 LED106.2 LED107.2 LED108.2 | length 4290.8
  Top Layer w10: LED107.2@12824.53,3396.1 LED107.2@12850,3370.63
  Top Layer w20: v1(13475,4235) 13540.63,4235 ; LED108.2@13714.37,2695 v1(13780,2695) ; LED105.2@14400,3544.37 v1(14400,3610)
  Top Layer w30: v1(12850,3305) LED107.2@12850,3370
  Bottom Layer w10: 14371.27,3731.66 14371.27,3733.73
  Bottom Layer w20: v1@13474.59,4252.16 ccw(c13623.66,3476.35) 14371.27,3731.66 ; I113.1@14355,3885 14355,3750 14371.27,3733.73
VCC201: C205.2 C206.2 C207.2 C210.2 C214.2 C218.1 C220.1 C226.2 C227.2 C228.2 C234.1 C235.1 C236.1 C237.1 C238.1 C242.1 C243.1 C299.1 I201.1 I225.1 I228.1 ISP201.2 L201.2 Opt_Rx_201.3 Opt_Tx_201.2 R266.2 R267.1 R268.1 R269.2 R270.2 R277.2 Reg202.2 U201.4 U201.6 U204.4 U204.8 U205.4 U205.8 U206.7 U207.14 | length 15095.4
  Top Layer w10: U201.6@13197.76,7893.39 13197.76,7942.76 13220,7965 13240,7965 13260,7945 U201.4@13260,7895
  Top Layer w30: 12170,7840 ISP201.2@12535,7840 ; U207.14@14535.59,7675 14565,7675 14595,7645 v1(14595,7525) ; v1@14600,7595 14660,7595 14661.54,7593.46 C243.1@14661.54,7535 ; v1@15100,7885 R267.1@15100,7956.54 ; v1(15100,7890) 15165,7890 15285,8010 15335,8010 15365,8040 v1(15365,8105) ; v1(15145,8350) 15235,8350 15265,8380 15265,8425 15330,8490 15430,8490 15445,8505 v1(15445,8575) ; v1@15155,8355 15185,8385 R268.1@15185,8417.6
  Top Layer w40: C228.2@12870,6343.46 C227.2@12968.46,6343.46 ; C227.2@12970,6345 13070,6345 13290,6345 Reg202.2@13295,6345 ; 13220,7970 v1(13220,8050) ; 13655,7820 13655,7925 13742.52,7925 Opt_Tx_201.2@13775,7957.48 13775,7965 13919.98,8109.98 13920,8114.96 13920,8185 C210.2@13890,8215 ; C210.2@13895,8220 I225.1@13895,8360 ; v1@15130,7340 15150,7320 C234.1@15217.6,7320 15220,7317.6 C237.1@15220,7240
  Top Layer w80: 12160,7840 12170,7840 ; I228.1@12195,8540 12195,8470 12170,8445 12170,8380 ; R277.2@12275,8380 12170,8380 ; v2(13020,7455) 13020,6800 ; C226.2@13070,6365 13070,6680 v2(13105,6715) 13020,6800 ; v2(13655,7635) 13655,7820 ; 12170,7840 12170,7430 12515,7085 12735,7085 13020,6800 ; 12170,7840 12170,8380
  Bottom Layer w10: 15230.59,7235.59 U206.7@15271.42,7235.59
  Bottom Layer w20: v1@15120,7340 15150,7340 15180,7310 15180,7260 15204.41,7235.59 15230.59,7235.59
  Bottom Layer w30: v1@14595,7605 14595,7515 14630,7480 14780,7480 14820,7440 14820,7330 ; v1(15100,7890) C235.1@15100,7956.54 15143.46,7956.54 15160,7940 U204.8@15160,7875 ; v1(15145,8350) 15238.98,8350 U205.8@15250,8361.02 ; C238.1@15185,8421.54 15228.46,8421.54 15250,8400 U205.8@15250,8335 ; U204.4@15310,8110 15310,8035 15321.54,8023.46 C220.1@15360,8023.46 15508.46,8023.46 ; C220.1@15365,8025 v1(15365,8105) 15500,8105 ; 15400,8510 15421.54,8488.46 C299.1@15445,8488.46 15503.46,8488.46 ; v1(15445,8575) 15505,8575 ; R270.2@15468.46,8740 15505,8740
  Bottom Layer w40: 12992.6,7697.4 L201.2@13075,7697.4 ; L201.2@13075,7700 13135,7700 13220,7785 13220,7900 13220,7980 v1(13220,8050) C205.2@13220,8120 ; 15505,7720 15505,8745
  Bottom Layer w50: 14045,6620 14135.21,6620 14280,6764.79 14280,7330 14945,7330 14965,7350 v1(15125,7350) ; 14060,6615 14115,6560 I201.1@14115,6500 I201.1@14115,6490 ; C236.1@14208.46,7040 14280,7040 ; C218.1@14212.4,7140 14280,7140 ; v1@15130,7340 15130,7400 15185,7455 15290,7455 15365,7530 15365,7640 15425,7700 15480,7700 15490,7710 ; R266.2@15435,7960 15490,7960
  Bottom Layer w80: 12990,7695 12950,7655 12950,7525 v2(13020,7455) 13105,7370 13390,7370 v2(13655,7635) ; v2@13105,6710 13200,6615 14060,6615
  other v1: 14595,7600
VCC201A: C212.1 C215.2 I209.1 S201.14 S203.1 U202.16 U203.16 | length 2839.6
  Top Layer w10: C215.2@10865,8946.54 10533.46,8946.54 10490,8990 10490,9045 10590,9145 11405,9145 11460,9090 v1(11460,8965) C212.1@11386.54,8965 ; C215.2@10866.54,8945 v1(10935,8945)
  Bottom Layer w10: U202.16@10805,8932.6 10817.4,8945 v1(10935,8945) ; U203.16@11325,8952.6 11337.4,8965 v1(11460,8965) 11525,8965 11625,8865 I209.1@11625,8700 11625,8635 11740,8520 S203.1@11765,8520 11703.43,8458.43 S201.14@11703.43,8354.33
VCC301: C319.2 C320.2 C321.2 C327.2 C328.2 C329.2 ISP301.2 L301.2 R334.2 Reg305.2 U301.4 U301.6 Valve301.3 Valve302.3 Valve303.3 | length 11091.4
  Top Layer w30: 19105,7975 C328.2@19225,7975 ; Reg305.2@19206.93,8255 19206.93,8093.07 19223.8,8076.2 19225,8075 C328.2@19225,7975 ; C329.2@19225,7875 C328.2@19225,7975 ; C329.2@19226.54,7875 19226.54,7828.46 v1(19245,7810) ; C328.2@19226.54,7975 C328.2@19225,7975
  Top Layer w40: R334.2@18853.46,7255 18853.46,7196.54 v1(18865,7185)
  Top Layer w60: v1(18780,6705) 19130,6705 v6(19300,6875) ; v6@20265,6445 Valve303.3@20366.57,6445
  Top Layer w80: v2(16225,7585) 16430,7380 ; Valve301.3@16460,6445 16230,6445 16030,6645 16030,6980 16430,7380 ; v2(16990,7585) 16635,7585 16430,7380 ; v2(17365,7430) 17595,7430 17920,7755 v1(18335,7755) 18335,8050 18530,8245 18835,8245 19105,7975
  Bottom Layer w20: 16065,8095 ISP301.2@16220,8095 ; 18465,7075 18492.76,7102.76 U301.6@18492.76,7166.61 ; U301.6@18494.25,7155 18494.25,7166.61 18494.25,7209.25 18510,7225 18535,7225 18555.75,7204.25 U301.4@18555.75,7166.61
  Bottom Layer w30: v1(18335,7755) 18335,7685 18362.6,7657.4 L301.2@18362.6,7650 ; 18465,6650 18465,6790 18465,6910 18465,7010 18465,7075
  Bottom Layer w60: 18465,6650 18530,6585 18665,6585 ; v1(18665,6455) 18665,6585 ; v1@18780,6710 v1(18780,6705) 18760,6695 18665,6600 18665,6585 ; v1(18865,7185) 19245,7185 ; v1(19245,7810) 19245,7185 ; v6@20260,6450 v6(20255,6450) 19725,6450 v6(19300,6875) 19245,6930 19245,7185
  Bottom Layer w80: 16065,8095 16015,8045 16015,7795 v2(16225,7585) ; v2(16990,7585) 17210,7585 v2(17365,7430)
VFB_201: C229.2 R263b.1 R264.1 TP222.1 U206.2 | length 2025.1
  Top Layer w20: R264.1@14655,8045 14645,8035 14470,8035 14470,7335 14480,7325 14950,7325 14960,7315 14960,7235 14975,7220 15020,7220 15040,7200 15040,7115 R263b.1@15075,7080 15095,7060 TP222.1@15175,7060
  Bottom Layer w10: 15070,7235 U206.2@15125,7235
  Bottom Layer w20: 15070,7235 15060,7225 15060,7165 C229.2@15075,7150
  Bottom Layer w40: R263b.1@15075,7080 C229.2@15075,7150
VIN33V3: C301.2 C302.2 C305.2 C306.2 C309.2 C310.2 C332.2 C333.2 LED302.1 P302.1 REG301.2 REG302.2 REG303.2 | length 8013
  Top Layer w30: 17145,7675 17145,7730 17162.6,7747.6 C306.2@17162.6,7775 ; REG302.2@17159.21,8018.94 17159.21,7920.79 17165,7915 17165,7875 C306.2@17165,7780 ; C310.2@19770,6165 19770,6075 19770,6045 19775.79,6039.21 REG303.2@19775.79,5931.06 ; C310.2@19772.4,6175 20075,6175 20080,6180 ; C333.2@21140,5395 LED302.1@21140,5590
  Top Layer w40: C302.2@16880,6195 16880.79,6194.21 16880.79,6095 REG301.2@16880.79,5931.06 ; P302.1@20807.24,5454.06 20910.94,5454.06 20970,5395 21000,5395 C333.2@21140,5395
  Top Layer w80: 16910,6080 17315,6080 ; 17145,7675 17145,7270 17315,7100 ; 17315,6070 17315,6080 ; 17315,7090 17315,6080 ; 17330,6085 17570,5845 18470,5845 18750,6125 19020,6125 19335,6440 19821.3,6440 P302.1@20807.24,5454.06
VIN301: C313.2 C314.2 C324.2 C325.2 C326.2 C330.2 C331.2 LED301.1 P301.1 REG304.2 Reg305.1 Reg305.5 | length 3532.5
  Top Layer w30: v1(19070,8255) Reg305.1@19140,8255 ; Reg305.5@19405,8260 19405,8255 19405,8225 19477.4,8152.6 C326.2@19477.4,8075 ; Reg305.5@19407.72,8255 v1(19475,8255) ; C326.2@19473.46,8061.54 C325.2@19473.46,7975 C324.2@19473.46,7875 19473.46,7826.54 19495,7805 ; 19975,7670 19980,7675 C314.2@20107.6,7675 ; REG304.2@20104.21,7938.94 20104.21,7820.79 20110,7815 20110,7775 C314.2@20110,7675 ; C331.2@21140,7075 LED301.1@21140,7235
  Top Layer w40: P301.1@20830,7170 20890,7170 20985,7075 21000,7075 C331.2@21140,7075
  Top Layer w80: 19490,7795 19845,7795 20465.94,7174.06 P301.1@20827.24,7174.06
  Bottom Layer w30: v1(19475,8255) v1@19480,8255
  Bottom Layer w60: v1(19070,8255) v1(19475,8255)
XTAL101: C101.2 U101.7 Y101.1 | length 366.2
  Bottom Layer w10: U101.7@12173.74,5438.39 12173.74,5478.74 12235,5540 12235,5640 Y101.1@12265,5670 ; C101.2@12231.54,5805 12231.54,5773.46 12260,5745 Y101.1@12260,5720
XTAL102: C103.2 U101.8 Y101.2 | length 701.6
  Bottom Layer w10: U101.8@12205.24,5438.39 12258.39,5438.39 12295,5475 12295,5535 12360,5600 12391.72,5600 12401.72,5610 12485,5610 12570,5695 Y101.2@12682.01,5695 Y101.2@12685,5695 ; Y101.2@12676.54,5726.54 12678.46,5726.54 C103.2@12678.46,5805
XTAL201: C203.2 U201.7 Y201.1 | length 702.7
  Top Layer w10: 13155,8060 13150,8055 13150,7990 13166.26,7973.74 U201.7@13166.26,7893.39
  Top Layer w40: 13155,8060 13155,8185 13280,8310 Y201.1@13332.01,8310 ; Y201.1@13331.54,8316.54 13332.01,8316.54 C203.2@13505,8316.54
XTAL202: C204.2 U201.8 Y201.2 | length 662.5
  Top Layer w20: 13111.61,7893.39 U201.8@13134.76,7893.39
  Top Layer w40: C204.2@12785,8316.54 Y201.2@12953.46,8316.54 ; Y201.2@12957.99,8310 12957.99,8047.01 13105,7900
XTAL301: C317.2 U301.7 Y301.1 | length 783.3
  Bottom Layer w20: 18461.26,7126.26 U301.7@18461.26,7166.61
  Bottom Layer w30: C317.2@18030,6661.54 18203.46,6661.54 18355,6813.07 18355,7022.89 18457.76,7125.65
XTAL302: C318.2 U301.8 Y301.2 | length 483.4
  Bottom Layer w10: 18356.61,7166.61 U301.8@18429.76,7166.61
  Bottom Layer w30: C318.2@18030,7050 18210,7050 18215,7050 18215,7025 18356.61,7166.61
pads on no net: ISP101.0 ISP101.7 ISP201.0 ISP201.7 ISP301.0 ISP301.7 MOS107.3 MOS107.4 MOS107.5 MOS206.3 MOS206.4 MOS206.5 MOS302.3 MOS302.4 MOS302.5 MOS305.3 MOS305.4 MOS305.5 MOS306A.1 MOS306A.2 MOS306A.6 Reg201.4 Reg202.4 Reg305.4 S204.0 T201.0 T201.2 T201.3 U101.13 U101.22 U201.19 U207.3 U207.4 U207.5 U207.6 U207.8 U207.9 U207.10 U207.11 U207.12 U207.13 U301.30 U301.31
copper on no net: | length 53098.6
  Top Layer w10: 13373.54,5883.39 15538.9,5883.39 15538.9,4700 13373.9,4700 13373.9,5883.39 ; 12640,2485 16650,2485 16650,2720 16655,2725 16655,4480 12640,4480 12640,2485 ; 14568.54,3465 ccw(c13623.66,3465) 14568.54,3465 ; 16618.54,3490 ccw(c15673.66,3490) 16618.54,3490
  Bottom Layer w10: 17861.81,4015 ccw(c17350,4015) 17861.81,4015 ; 18386.81,2850 ccw(c17875,2850) 18386.81,2850 ; 19026.81,4025 ccw(c18515,4025) 19026.81,4025 ; 19526.81,2860 ccw(c19015,2860) 19526.81,2860 ; 20136.81,4015 ccw(c19625,4015) 20136.81,4015 ; 20721.81,2885 ccw(c20210,2885) 20721.81,2885 ; 21286.81,3995 ccw(c20775,3995) 21286.81,3995
  other v2: 18960,8710

## Polygon pours and split planes (outlines as drawn)
GND301 on Bottom Layer "Top Layer-No Net" (solid, remove dead copper, pour order 1001): 15770,9210 21280,9210 21280,4720 15770,4720
GND201 on Bottom Layer "Top Layer-No Net" (solid, remove dead copper, pour order 1002): 12080,9165 12080,6025 14025,6025 14025,9165
GND101A on Bottom Layer "bottom layer gnd - led " (solid, remove dead copper, pour order 1008): 12185,2675 12185,3355 11645,3355 11555,3265 11550,3265
GND101A on Bottom Layer "bottom layer gnd - led " (solid, remove dead copper, pour order 1007): 11485,3145 11485,3930 11490,3935 12240,3935 12240,3145
GND101A on Bottom Layer "bottom layer gnd - led " (solid, remove dead copper, pour order 1006): 12185.04,4404.96 12185.08,4405 12385,4405 12385,2675 12185,2675
GND101A on Bottom Layer "bottom layer gnd - led " (solid, remove dead copper, pour order 1005): 11675,3935 11685,3925 12280,3925 12280,4310 12185,4405
GND101B on Bottom Layer "PSU board gnd" (solid, remove dead copper, pour order 1005): 15540,4705 13380,4705 13375,4700 13375,5890 15535,5890 15540,5885
VCC101 on Bottom Layer "PSU board gnd" (solid, remove dead copper, pour order 1001): 11120,5885 13295,5885 13295,4690 11120,4690
GND201A on Bottom Layer "I/O board gnd" (solid, remove dead copper, pour order 1004): 10430,6150 11835,6150 11835,9170 10435,9170 10430,9175
HVGND201 on Bottom Layer "HV Ground Plane" (solid, remove dead copper, pour order 1000): 15545,6025 15545,9175 14845,9175 14835,9165 14835,8435 14825,8435 14470,8080 14465,8075 14465,7305 14865,7305 14920,7250 14915,7245 14915,7075 14915,7035 15030,6920 15065,6885 15065,6025 15540,6025 15545,6020 15545,6030
GND301 on Top Layer "Top Layer-No Net" (solid, remove dead copper, pour order 1000): 15770,9210 21280,9210 21280,4720 15770,4720
GND201 on Top Layer "Top Layer-No Net" (solid, pour order 1000): 13350,6310 13345,6315 12540,6315 12540,6180 12545,6175 12830,6175 12830,6130 13185,6130 13185,6235 13350,6235
VCC201 on Top Layer "Top Layer-No Net" (solid, remove dead copper, pour order 1001): 12080,9165 14025,9165 14025,6025 12080,6025
GND101A on Top Layer "Top Layer-vcc_led" (solid, remove dead copper, pour order 1004): 12185,2675 12185,3275 12180,3280 12150,3250 11565,3250
GND101A on Top Layer "Top Layer-vcc_led" (solid, remove dead copper, pour order 1003): 11485,3930 11485,3145 12300,3145 12335,3180 12295,3220 12295,3935
GND101A on Top Layer "Top Layer-vcc_led" (solid, remove dead copper, pour order 1002): 11485,3930 11485,3145 12360,3145 12360,3925 12349.65,3935
GND101A on Top Layer "Top Layer-vcc_led" (solid, remove dead copper, pour order 1001): 11665,3920 12361.22,3920 12361.22,4403.75 12359.98,4405 12187.5,4405
GND101A on Top Layer "Top Layer-vcc_led" (solid, remove dead copper, pour order 1000): 12385,4405 12190,4405 12185,4400 12185,2675 12385,2675
NetC201_2 on Top Layer "IO board LED VCC" (solid, remove dead copper, pour order 1000): 11600,7270 11635,7235 11635,6960 11635,6875 11375,6615 11340,6580 10960,6580 10920,6580 10675,6825 10630,6870 10630,7255 10630,7290 10800,7460 10905,7565 11115,7565 11300,7565 11310,7555 11445,7420 11515,7420
VCC201A on Top Layer "I/O board vcc" (solid, remove dead copper, pour order 1001): 10430,9175 10430,8220 11835,8220 11835,9175
GND201A on Top Layer "I/O board gnd" (solid, remove dead copper, pour order 1002): 11835,8220 10430,8220 10430,6150 11835,6150
BATTERYSENSE_101B on Top Layer "PSU board vcc" (solid, remove dead copper, pour order 1003): 15535,4705 15530,4700 13375,4700 13375,5890 15535,5890
GND101 on Top Layer "PSU board gnd" (solid, remove dead copper, pour order 1000): 11120,5885 13295,5885 13295,4690 11120,4690

## Keep-outs
Keep-Out Layer:
  circle w10: c12240,6185 r128
  circle w10: c12240,9005 r128
  circle w10: c15380,6185 r128
  circle w10: c15380,9005 r128

## Silkscreen, mask and mechanical layers (free items; w line width, h text height)
Top Overlay:
  circle w10: c20465,6445 r787.4
  circle w10: c18515,6445 r787.4
  circle w10: c16565,6445 r787.4
  circle w10: c13623.66,3465 r708.66
  circle w10: c15673.66,3490 r708.66

## Text inside footprints (layer, text, board x,y; h text height)
Opt_Rx_201: Top Overlay "O" at 13844.13,7780.31 h31.5 r90; Top Overlay "-" at 13840.2,7941.73 h31.5 r90; Top Overlay "+" at 13840.2,8103.15 h31.5 r90
Opt_Tx_201: Top Overlay "In" at 13704.13,7780.31 h31.5 r90; Top Overlay "-" at 13712.01,8107.09 h31.5 r90; Top Overlay "+" at 13704.13,7945.67 h31.5 r90
OptRx101: Bottom Overlay "O" at 11684.68,5555.87 h31.5; Bottom Overlay "-" at 11523.27,5559.8 h31.5; Bottom Overlay "+" at 11361.85,5559.8 h31.5
OptTx101: Bottom Overlay "In" at 11684.68,5695.87 h31.5; Bottom Overlay "-" at 11357.91,5687.99 h31.5; Bottom Overlay "+" at 11519.33,5695.87 h31.5